# Altium PCB PCB.PcbDoc (part 2 of 2)
Units mm, origin at the board's own origin, x right, y up, seen from the top; angles counter-clockwise.
Board outline 168.8 x 66.7 mm, 2 copper layers (Top Layer, Bottom Layer); 76 components, 58 nets, 255 pads, 137 vias.
Unrouted connection lines stored in the file: 16.
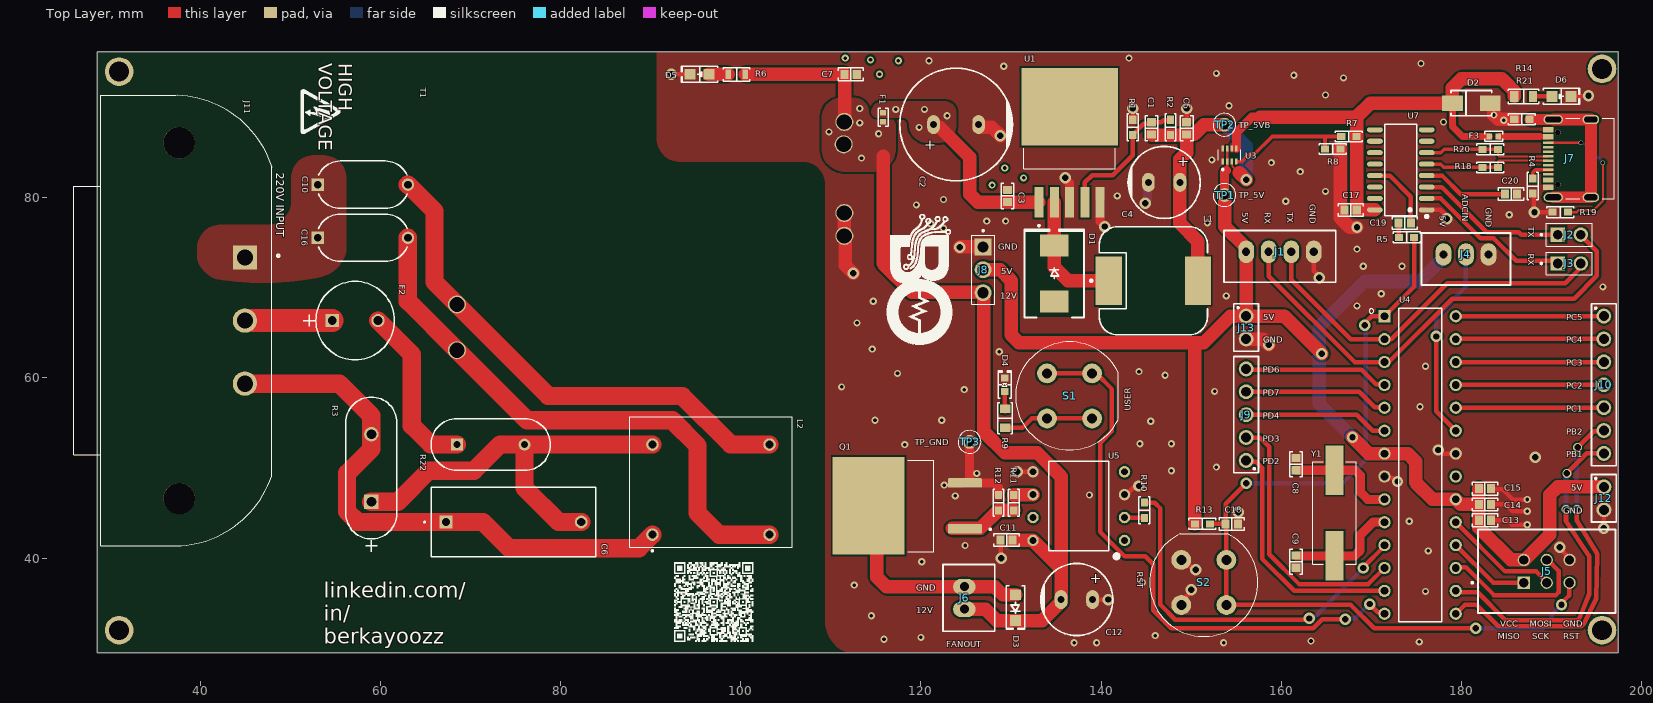
[diagram p0: Top Layer view]

## Part data (continued)
R5: library part HCJ0603ZT0R00, "RES 0 OHM JUMPER 1/4W 0603", Device Package="0603 (1608 Metric)", manufacturer="Stackpole Electronics Inc", Operating Temperature="-55°C ~ 155°C", Power (Watts)="0.25W, 1/4W", Ratings=AEC-Q200, Supplier Device Package=0603, Supplier Part Number 1=HCJ0603ZT0R00CT-ND, Tolerance=Jumper, componentlink1description=Datasheet, componentlink1url=https://www.seielect.com/catalog/sei-hcj.pdf, componentlink2description="DigiKey Link", componentlink2url=https://www.digikey.com/en/products/detail/stackpole-electronics-inc/HCJ0603ZT0R00/4357660, Composition="Metal Foil", Features="Automotive AEC-Q200", Height - Seated (Max)="0.018\" (0.45mm)", lastupdated="9.02.2024 20:43:15", Lifecycle Status=Active, Minimum Order=1, Number of Terminations=2, Package / Case="0603 (1608 Metric)", packaging=TapeAndReel, Part Number=HCJ0603ZT0R00, Part Status=Active, partid=10189, price=0.06, Resistance="0 Ohms", series=HCJ, Size / Dimension="0.061\" L x 0.031\" W (1.55mm x 0.80mm)", Supplier 1=DigiKey
R6: library part RK73H2ATTD6200F, "RES 620 OHM 1% 1/4W 0805", Device Package="0805 (2012 Metric)", manufacturer="KOA Speer Electronics, Inc.", Operating Temperature="-55°C ~ 155°C", Power (Watts)="0.25W, 1/4W", Ratings=AEC-Q200, Supplier Device Package=0805, Supplier Part Number 1=2019-RK73H2ATTD6200FCT-ND, Temperature Coefficient=±100ppm/°C, Tolerance=±1%, componentlink1description=Datasheet, componentlink1url=http://www.koaspeer.com/catimages/Products/RK73H/RK73H.pdf, componentlink2description="DigiKey Link", componentlink2url=https://www.digikey.com/en/products/detail/koa-speer-electronics-inc/RK73H2ATTD6200F/10234040, Composition="Thick Film", Features="Automotive AEC-Q200", Height - Seated (Max)="0.024\" (0.60mm)", lastupdated="25.07.2024 09:45:22", Lifecycle Status=Active, Minimum Order=1, Number of Terminations=2, Package / Case="0805 (2012 Metric)", packaging=CutTape, Part Number=RK73H2ATTD6200F, Part Status=Active, partid=33904, price=0.01, Resistance="620 Ohms", series=RK73H, Size / Dimension="0.079\" L x 0.049\" W (2.00mm x 1.25mm)", Supplier 1=DigiKey
R7 R8 R12 R13: library part RT0603FRE0710KL, "RES SMD 10K OHM 1% 1/10W 0603", Device Package="0603 (1608 Metric)", manufacturer=Yageo, Operating Temperature="-55°C ~ 155°C", Power (Watts)="0.1W, 1/10W", Supplier Device Package=0603, Supplier Part Number 1=YAG2321CT-ND, Temperature Coefficient=±50ppm/°C, Tolerance=±1%, componentlink1description=Datasheet, componentlink1url=https://www.yageo.com/upload/media/product/productsearch/datasheet/rchip/PYu-RT_1-to-0.01_RoHS_L_11.pdf, componentlink2description="DigiKey Link", componentlink2url=https://www.digikey.com/en/products/detail/yageo/RT0603FRE0710KL/1075040, Composition="Thin Film", Height - Seated (Max)="0.022\" (0.55mm)", lastupdated="25.07.2024 09:19:32", Lifecycle Status=Active, Minimum Order=1, Number of Terminations=2, Package / Case="0603 (1608 Metric)", packaging=TapeAndReel, Part Number=RT0603FRE0710KL, Part Status=Active, partid=5671, price=0.01, Resistance="10 kOhms", series=RT, Size / Dimension="0.063\" L x 0.031\" W (1.60mm x 0.80mm)", Supplier 1=DigiKey
R9 R14: library part AC0805FR-7W220RL, "RES 220 OHM 1% 1/4W 0805", Device Package="0805 (2012 Metric)", manufacturer=Yageo, Operating Temperature="-55°C ~ 155°C", Power (Watts)="0.25W, 1/4W", Ratings=AEC-Q200, Supplier Device Package=0805, Supplier Part Number 1=13-AC0805FR-7W220RLCT-ND, Temperature Coefficient=±100ppm/°C, Tolerance=±1%, componentlink1description=Datasheet, componentlink1url=https://www.yageo.com/upload/media/product/productsearch/datasheet/rchip/PYu-AC_51_RoHS_L_10.pdf, componentlink2description="DigiKey Link", componentlink2url=https://www.digikey.com/en/products/detail/yageo/AC0805FR-7W220RL/17022423, Composition="Thick Film", Features="Automotive AEC-Q200, Moisture Resistant", Height - Seated (Max)="0.024\" (0.60mm)", lastupdated="25.07.2024 09:19:55", Lifecycle Status=Active, Minimum Order=1, Number of Terminations=2, Package / Case="0805 (2012 Metric)", packaging=TapeAndReel, Part Number=AC0805FR-7W220RL, partid=87434, price=0.01, Resistance="220 Ohms", series=AC, Size / Dimension="0.079\" L x 0.049\" W (2.00mm x 1.25mm)", Supplier 1=DigiKey
R10: library part RT0603BRD07200RL, "RES SMD 200 OHM 0.1% 1/10W 0603", Device Package="0603 (1608 Metric)", manufacturer=Yageo, Operating Temperature="-55°C ~ 155°C", Power (Watts)="0.1W, 1/10W", Supplier Device Package=0603, Supplier Part Number 1=YAG1579CT-ND, Temperature Coefficient=±25ppm/°C, Tolerance=±0.1%, componentlink1description=Datasheet, componentlink1url=https://www.yageo.com/upload/media/product/productsearch/datasheet/rchip/PYu-RT_1-to-0.01_RoHS_L_11.pdf, componentlink2description="DigiKey Link", componentlink2url=https://www.digikey.com/en/products/detail/yageo/RT0603BRD07200RL/1072346, Composition="Thin Film", Height - Seated (Max)="0.022\" (0.55mm)", lastupdated="25.07.2024 09:19:29", Lifecycle Status=Active, Minimum Order=1, Number of Terminations=2, Package / Case="0603 (1608 Metric)", packaging=TapeAndReel, Part Number=RT0603BRD07200RL, Part Status=Active, partid=10314, price=0.03, Resistance="200 Ohms", series=RT, Size / Dimension="0.063\" L x 0.031\" W (1.60mm x 0.80mm)", Supplier 1=DigiKey
R11 R18 R20: library part AC0603FR-0710RL, "RES SMD 10 OHM 1% 1/10W 0603", Device Package="0603 (1608 Metric)", manufacturer=Yageo, Operating Temperature="-55°C ~ 155°C", Power (Watts)="0.1W, 1/10W", Ratings=AEC-Q200, Supplier Device Package=0603, Supplier Part Number 1=311-10LDCT-ND, Temperature Coefficient=±100ppm/°C, Tolerance=±1%, componentlink1description=Datasheet, componentlink1url=https://www.yageo.com/upload/media/product/productsearch/datasheet/rchip/PYu-AC_51_RoHS_L_7.pdf, componentlink2description="DigiKey Link", componentlink2url=https://www.digikey.com/en/products/detail/yageo/AC0603FR-0710RL/2828512, Composition="Thick Film", Features="Automotive AEC-Q200, Moisture Resistant", Height - Seated (Max)="0.022\" (0.55mm)", lastupdated="25.07.2024 09:19:31", Lifecycle Status=Active, Minimum Order=1, Number of Terminations=2, Package / Case="0603 (1608 Metric)", packaging=TapeAndReel, Part Number=AC0603FR-0710RL, Part Status=Active, partid=8121, price=0.01, Resistance="10 Ohms", series=AC, Size / Dimension="0.063\" L x 0.031\" W (1.60mm x 0.80mm)", Supplier 1=DigiKey
R21: library part CRCW06031M00JNEAHP, "RES SMD 1M OHM 5% 1/3W 0603", Device Package="0603 (1608 Metric)", manufacturer="Vishay Dale", Operating Temperature="-55°C ~ 155°C", Power (Watts)="0.333W, 1/3W", Ratings=AEC-Q200, Supplier Device Package=0603, Supplier Part Number 1=541-1.0MSACT-ND, Temperature Coefficient=±200ppm/°C, Tolerance=±5%, componentlink1description=Datasheet, componentlink1url=http://www.vishay.com/docs/20043/crcwhpe3.pdf, componentlink2description="DigiKey Link", componentlink2url=https://www.digikey.com/en/products/detail/vishay-dale/CRCW06031M00JNEAHP/2222314, Composition="Thick Film", Features="Automotive AEC-Q200, Pulse Withstanding", Height - Seated (Max)="0.022\" (0.55mm)", lastupdated="9.02.2024 20:42:32", Lifecycle Status=Active, Minimum Order=1, Number of Terminations=2, Package / Case="0603 (1608 Metric)", packaging=TapeAndReel, Part Number=CRCW06031M00JNEAHP, Part Status=Active, partid=21324, price=0.01, Resistance="1 MOhms", series=CRCW-HP, Size / Dimension="0.063\" L x 0.033\" W (1.60mm x 0.85mm)", Supplier 1=DigiKey
R22: "INRUSH CURRENT LIMITER", Manufacturer_Name=CANTHERM, Copyright="Copyright (C) 2025 Ultra Librarian. All rights reserved.", Manufacturer_Part_Number=MF72-010D11, RefDes=RefDes, Type=Type
S1 S2: "Pushbutton Switch SPST-NO Keyswitch Through Hole", Package=None, Availability=Unavailable, MP=D6R90_F1_LFS, price=None
T1: library part "HIECUBE AP12N24-Zero", "12V 85VAC~265VAC 2A 100V~370V 24W 87% AC/DC-DC Through Hole,49x36mm AC-DC Power Modules ROHS", componentlink1description=DATASHEET, componentlink1url=http://www.hiecube.com/wap/hypx/detail/id/10127
TP1 TP2 TP3: "Test Point Miniature THM H .300 Nylon 46 Insulated Brown PhosBronze/Silver", Package=None, Check_prices=https://www.snapeda.com/parts/5115/Keystone/view-part/?ref=eda, MF="Keystone Electronics", MP=5115, SnapEDA_Link=https://www.snapeda.com/parts/5115/Keystone/view-part/?ref=snap
U1: library part LM2596, "Pwr Sply Func, Voltage Regulator, Buck, Switching, TO-263, IS 5mA, VO 1.2 to 37V", Case/Package=TO-263, manufacturer="TI National Semiconductor", Max Operating Temperature=125°C, Max Output current=3A, Max Output Voltage=37V, Max Supply Voltage=40V, Min Operating Temperature=-40°C, Min Output Voltage=1.2V, Min Input Voltage=4.5V, Quiescent Current=5mA, Supplier Part Number=926-LM2596S-ADJ/NOPB, Switching Frequency=173kHz, Category="Voltage Regulators - Switching", componentlink1description=https://datasheet.ciiva.com/27056/2051160-27056491.pdf?src-supplier=Jameco, componentlink1url=https://datasheet.ciiva.com/27056/2051160-27056491.pdf?src-supplier=Jameco, componentlink2description=https://datasheet.ciiva.com/15112/getdatasheetpartid-55559-15112636.pdf?src-supplier=Verical, componentlink2url=https://datasheet.ciiva.com/15112/getdatasheetpartid-55559-15112636.pdf?src-supplier=Verical, ComponentLink3Description=https://datasheet.ciiva.com/41457/001013814-da-01-en-ic-reg-buc-lm2596s-adj-nopb-to-263-5-tid-41457756.pdf?src-supplier=Conrad, ComponentLink3URL=https://datasheet.ciiva.com/41457/001013814-da-01-en-ic-reg-buc-lm2596s-adj-nopb-to-263-5-tid-41457756.pdf?src-supplier=Conrad, ComponentLink4Description=https://datasheet.ciiva.com/22669/1874590-22669464.pdf?src-supplier=Element14, ComponentLink4URL=https://datasheet.ciiva.com/22669/1874590-22669464.pdf?src-supplier=Element14, ComponentLink5Description=https://datasheet.ciiva.com/14150/jqlm2596x-xx-e-14150653.pdf?src-supplier=Distrelec, ComponentLink5URL=https://datasheet.ciiva.com/14150/jqlm2596x-xx-e-14150653.pdf?src-supplier=Distrelec, ComponentLink6Description=https://datasheet.ciiva.com/6596/lm2596-6596342.pdf?src-supplier=Digikey, ComponentLink6URL=https://datasheet.ciiva.com/6596/lm2596-6596342.pdf?src-supplier=Digikey, designed by=berkay, Efficiency=73%, Height=4.57mm, Length=10.16mm, Manufacturer Part Number=LM2596S-ADJ/NOPB, Max Duty Cycle=100%, Mounting Technology="Surface Mount", Number of Channels=1NUMBER, Number of Outputs=1, Operating Supply Voltage=40V, Output Current=3A, Output Type=Adjustable, Output Voltage=37V, packaging=Rail/Tube, Pins=5, Pricing="1=9,04, 10=6,42, 50=6,13, 100=5,32, 1000=4,63, 10000=4,1 (USD)", Radiation Hardening=No, Reach SVHC Compliant=No, RoHS=Yes, RoHS Compliant=Yes, series=LM2596, Stock=1472, Supplier=Mouser, Thickness=4.58mm, Weight=0.056128oz, Width=8.64mm
U3: "1.6-V to 5.5-V, 40-mâ„", Package=None, Check_prices=https://www.snapeda.com/parts/TPS2116DRLR/Texas+Instruments/view-part/?ref=eda, MF="Texas Instruments", MP=TPS2116DRLR, SnapEDA_Link=https://www.snapeda.com/parts/TPS2116DRLR/Texas+Instruments/view-part/?ref=snap
U4: "ATmega Series 20 MHz 32 KB Flash 2 KB SRAM 8-Bit Microcontroller - DIP-28", Package=None, Availability=Unavailable, MP=ATMEGA328P-PU, price=None
U5: library part TLP250HF, "Photocoupler (photo-IC output), IGBT driver, IOP=+/-2.5 A, 3750 Vrms, DIP8", Manufacturer_Name="Toshiba Electronic Devices & Storage Corp.", Number_devices_in_Package=1, Source_Package=TLP250H, Copyright="Copyright (C) 2025 Ultra Librarian. All rights reserved.", Datasheet=https://toshiba.semicon-storage.com/info/docget.jsp?did=13872&prodName=TLP250H, Manufacturer_Part_Number=TLP250H(F), RefDes=Refdes, Type=Type
U7: JLCPCB Part Class="Extended Part", manufacturer=WCH(南京沁恒), Voltage - Supply=3.3V；5V, Add into BOM=yes, Applications Function=Transceiver, Convert to PCB=yes, Data Rate=2Mbps, Datasheet=https://atta.szlcsc.com/upload/public/pdf/source/20250604/33626338A5406B1E2A8163A86C0531AF.pdf, Device=CH340C, LCSC Part Name=CH340C, Manufacturer Part=CH340C, Supplier=LCSC, Supplier Footprint=SOP-16, Supplier Part=C84681, Symbol=CH340C, USB Protocol="USB 2.0"
Y1: "16 MHz Â±30ppm Crystal 20pF 40 Ohms HC-49/US", Package="CSM-7X-3L-5G3X-2 ECS", Check_prices=https://www.snapeda.com/parts/ECS-160-20-5PX-TR/ECS/view-part/?ref=eda, MF="ECS Inc.", MP=ECS-160-20-5PX-TR, SnapEDA_Link=https://www.snapeda.com/parts/ECS-160-20-5PX-TR/ECS/view-part/?ref=snap

## Free pads (board coordinates)
  round 3.175 hole 2.2 mask-3.2: q(31,32) q(31,94) q(195.6,32) q(195.6,94.3)

## Via types
v1: diameter 0.8, hole 0.4, Top Layer to Bottom Layer, tented both sides, 92 vias
v2: diameter 1.27, hole 0.711, Top Layer to Bottom Layer, tented both sides, 38 vias
v3: diameter 1, hole 0.7, Top Layer to Bottom Layer, tented both sides, 4 vias
v4: diameter 0.5, hole 0.4, Top Layer to Bottom Layer, tented both sides, 2 vias
v5: diameter 1.27, hole 0.711, Top Layer to Bottom Layer, 1 vias

## Nets (pads, with @x,y where several pads share a name; then routed paths per layer and width w, separated by ;. In a path a pad name is that pad's centre, name@x,y a point inside that pad or via, vN(x,y) a via of type N, cw(c..) or ccw(c..) an arc to the next point about the centre after c; other vN are vias at no path point)
5V_MAIN: C13.2 C14.2 C15.2 J1.1 J4.1 J5.02 J8.2 J12.1 J13.1 R13.2 TP1.TP U3.2 U3.7 U4.7 U4.20 | length 162.8
  Top Layer w0.3: 153.892,83.039 154,83.147 U3.2 U3.7
  Top Layer w1: TP1.TP 153.7,82.847 153.892,83.039
  Top Layer w1.5: J8.2 128.8,72 130,70.8 130,64.779 130.879,63.9 150.4,63.9 ; R13.2 150.4,63.9 ; TP1.TP 153.7,76.843 156.1,74.443 J1.1 J13.1 ; v2(164.5,62.7) 160.34,66.86 J13.1 ; v2(167.9,53.4) 169.7,51.6 U4.7 174.021,51.6 174.9,50.721 174.9,48.4 176.78,46.52 U4.20 179.94,45.95 C14.2 ; C15.2 C14.2 ; J12.1@195.769,47.9 190.679,47.9 189.8,47.021 189.8,42.6 187.02,39.82 187.02,39.8 185.485,39.8 181.925,43.36 C13.2 C14.2 ; 150.4,63.9 151.4,63.9 154.331,66.831 156.071,66.831 J13.1
  Bottom Layer w1.5: v2(167.9,53.4) 164.2,57.1 164.2,62.4 v2(164.5,62.7) 164.2,63 164.2,65.7 169.2,70.7 175.375,70.7 178,73.325 J4.1
12-5V: C1.2 C4.1 C5.2 L1.2 R2.2 TP2.TP U3.3 | length 35.3
  Top Layer w0.2: U3.3 154.5,83.83 154.56,83.77 154.56,83.503 155.063,83 155.2,83
  Top Layer w1.5: C1.2 145.675,86.95 R2.2 149.425,86.95 C5.2 ; C4.1 148.75,77.15 150.75,75.15 L1.2 ; C4.1@148.75,81.95 148.75,84.26 149.5,85.01 C5.2 ; TP2.TP 151.415,88.1 150.363,87.048 149.523,87.048 C5.2 ; 155.35,82.75 v2(156.1,82)
  Bottom Layer w1.5: TP2.TP 156.1,85.699 v2(156.1,82)
12V: C7.2 C11.2 C12.2 D3.2 F1.1 J6.1 J8.3 R6.1 T1.3 T1.4 U5.8 | length 99.4
  Top Layer w1.5: R6.1 C7.2 111.525,88.435 cw(c111.5,88.435) T1.3 ; 115.8,84.6 115.8,72.7 118.968,69.532 126.828,69.532 J8.3 126.972,69.388 126.972,69.123 127,69.095 127,54 129.3,51.7 132.9,51.7 135.55,49.05 135.55,38.85 ; J6.1 127.175,34.325 128.43,33.07 D3.2 133.47,33.07 135.55,35.15 C12.2 135.55,38.85 ; C11.2@130.215,41.96 U5.8 135.55,38.85
  other v1: 113.4,84.4 115.3,87.1 109.8,87.3 113.2,88.3 113.2,89.9
AC_L: F2.1 J11.2 | length 9.7
  Top Layer w2.54: J11.2 F2.1
AC_N: C6.1 J11.3 L2.1 R3.2 | length 63.5
  Top Layer w2.032: J11.3 55.438,59.362 59,55.8 R3.2 59,52.1 56.3,49.4 56.3,45.19 57.49,44 C6.1 71.4,44 74.3,41.1 88.7,41.1 L2.1
D_N: J7.A7 R20.1 R20.2 U7.6 | length 13.8
  Top Layer w0.2: R20.1 184.05,84.707 184.167,84.59 186.607,84.59 189.595,84.59 J7.A7
  Top Layer w0.381: U7.6@176.682,84.998 177.698,84.998 178.063,85.363 R20.2 R20.1
D_P: J7.A6 R18.1 R18.2 U7.5 | length 13.8
  Top Layer w0.2: R18.1 184.05,84.019 184.167,84.136 186.795,84.136 189.595,84.136 J7.A6
  Top Layer w0.381: U7.5@176.705,83.71 177.69,83.71 178.037,83.363 R18.2 R18.1
GND: C2.2 C3.1 C4.2 C5.1 C7.1 C8.2 C9.2 C11.1 C12.1 C13.1 C14.1 C15.1 C17.2 C18.2 C20.1 D1.1 D2.2 D4.2 D5.2 D6.2 J1.4 J4.3 J5.06 J7.A1_B12 J7.B1_A12 J8.1 J12.2 J13.2 Q1.3 R1.1 R4.1 R8.1 R12.1 R19.1 R21.2 S2.1 S2.2 T1.5 T1.6 TP3.TP U1.3 U1.5 U3.1 U3.8 U4.8 U4.22 U5.3 U5.5 U7.1 | length 98.6
  Top Layer w0.5: v2(92.3,93.7) D5.2 ; C11.1 128.862,41.963 128.862,40.037 v2(128.9,40) ; v2(130.7,49.6) 130.71,49.59 132.43,49.59 U5.5 ; C12.1 v2(140.8,35.4) ; U5.3 142.808,47.04 143.621,47.853 144.053,47.853 v2(144.2,48) ; R1.1 v2(143.5,89.9) ; S2.2 148.9,35.192 150,36.292 v2(150,36.5) ; S2.1 149.192,39.8 150.292,38.7 v2(150.5,38.7) ; C5.1 v2(149.5,89.9) ; C18.2 155.188,43.812 155.188,45.088 v2(155.2,45.1) ; J1.4 163.6,71.908 164.2,71.308 v2(164.2,71.1) ; U4.8 171.614,48.896 172.296,48.896 172.692,48.5 v2(172.9,48.5) ; U7.1 177.652,78.648 178.2,78.1 178.2,78.074 178.383,77.891 v2(178.383,77.683) ; v2(177.4,52) 177.608,52 178.008,51.6 U4.22 ; C13.1 185.1,44.2 185.6,43.7 v1(187.3,43.7) ; C14.1 184.95,45.95 185.7,45.2 v1(187.3,45.2) ; C15.1 183.427,47.7 183.475,47.652 184.548,47.652 185.7,46.5 v1(187.3,46.5) ; R4.1 188,80.35 188,78.5 v2(188.1,78.4) R19.1 ; v2@188.188,51.212 v2(188.2,51.2) ; v2(190.9,41.2) 190.9,41.1 192.1,39.9 J5.06@192.1,39.8 ; D6.2 192.175,91.275 194.075,91.275 v2(194.1,91.3) ; v2(195.8,43.3) 195.805,43.305 195.805,45.355 J12.2
  Top Layer w1: Q1.3 Q1.3@125.12,48.34 ; TP3.TP 125.4,48.62 Q1.3@125.12,48.34 ; R12.1 128.595,47.005 128.595,47.905 128.16,48.34 Q1.3@125.12,48.34 ; v2(136,82.2) 136,82.127 136.5,81.627 U1.3 ; U1.5 139.9,77.373 140.4,76.873 v2(140.4,76.8)
  Top Layer w1.5: T1.5 T1.6 111.59,75.67 111.59,72.51 v2(112.5,71.6) ; v2(124.3,74.5) 124.34,74.54 J8.1 ; C2.2 126.4,87.875 126.45,87.825 127.875,87.825 v2(128.8,86.9) ; J13.2 156.129,64.291 158.009,64.291 v2(158.6,63.7) ; R8.1 166.55,77.75 167.6,76.7 v2(168.4,76.7) ; D2.2 183.5,90.5 183.6,90.4 v1(183.6,89.179) 184.079,88.7 R21.2
  Bottom Layer w0.5: S2.2 S2.2@148.9,35.26
  Bottom Layer w1: v2(144.9,79.4) 144.9,79.473 145.173,79.747 145.173,81.623 C4.2
  other v1: 137,30.6 139.5,30.6 153.6,30.6 175.3,30.7 163.3,30.8 115.9,31 120,31.2 146,31.4 114.5,33.6 176,36.3 112.6,37 144.6,37.3 120.1,39.6 176.3,40.8 124.9,41.4 174.2,44.1 123.8,46.9 138.7,47 122.6,48.1 126.2,49.4 147.8,49.7 152.8,50.1 118.2,52.6 144.3,52.7 147.8,52.7 145.5,55.2 114.9,55.3 122.3,55.3 175.4,56.8 152.6,58.5 124.8,58.7 111.2,59 147.1,60.3 117.4,60.5 144.2,60.7 176,61.3 128.7,62.9 114.6,63.2 112.9,66.1 168.405,67.995 114.7,68.5 153.9,69.1 171.1,69.35 195.7,70.1 169.1,72.4 173.4,72.4 168.4,74.3 122.5,76.6 121.1,77.1 151.8,77.2 127.3,77.4 129.4,77.4 185.3,78.1 119.5,79.2 160.5,79.6 122.5,79.8 141.8,80.2 164.9,80.7 162.1,82.9 158.9,83.9 152.3,84.2 178,88.4 184.7,88.6 154.2,90.2 164.9,91.4 166.9,93.3 161.4,93.6 152.8,93.8 129.2,94.6 175.5,94.9 120.9,95.2 143.1,95.5
NetC1_1: C1.1 R1.2 R2.1 U1.4 | length 16
  Top Layer w0.5: U1.4 138.2,81.7 139,82.5 141.3,82.5 143.5,84.7 R1.2@143.5,87 ; R1.2 R1.2@143.5,87 ; R2.1 147.65,88.6 146.9,88.6 146.675,88.375 C1.1 145.455,88.23 144.735,88.23 144.327,87.823 144.323,87.823 R1.2@143.5,87
NetC2_1: C2.1 C3.2 F1.2 U1.1 | length 17.8
  Top Layer w1.5: C2.1 121.45,88.075 121.45,87.825 122.075,87.825 125.425,84.475 125.425,80.404 126.324,79.505 C3.2@129.6,79.505 ; C3.2@129.62,79.505 U1.1
  other v1: 119.8,87.8 122.9,89.1 117.2,89.8 120.4,89.8
NetC6_2: C6.2 L2.4 R3.1 R22.2 | length 46.5
  Top Layer w2.032: R3.1 61.95,46.25 65.4,49.7 70.4,49.7 73.3,52.6 R22.2 ; C6.2 79.8,44 76,47.8 R22.2 ; L2.4 R22.2
NetC8_1: C8.1 U4.9 Y1.2 | length 12.2
  Top Layer w1.016: C8.1 168.205,49.746 168.8,49.151 168.8,47.3 169.58,46.52 U4.9
NetC9_1: C9.1 U4.10 Y1.1 | length 12.2
  Top Layer w1.016: C9.1@161.679,40.246 168.139,40.246 168.734,40.841 168.734,42.534 170.208,44.008 U4.10@171.342,44.008
NetC10_2: C10.2 L2.3 T1.2 | length 56.7
  Top Layer w2.032: C10.2 66,78.507 66,70.65 T1.2 78.65,58 93.5,58 98.9,52.6 L2.3
NetC16_2: C16.2 L2.2 T1.1 | length 62.3
  Top Layer w2.032: C16.2 63.057,68.514 T1.1 76.27,55.3 92.4,55.3 95.2,52.5 95.2,45 97.6,42.6 L2.2
NetC18_1: C18.1 J5.05 R5.2 R13.1 S2.3 S2.4 U4.1 | length 101
  Top Layer w0.5: R13.1 C18.1 ; v2(156.1,48.3) 153.825,46.025 C18.1 ; v2(169.25,65.85) 169.397,65.997 169.397,66.216 170.021,66.84 U4.1 174.75,70.14 R5.2 ; v2(181.6,32.2) 170.3,32.2 167.7,34.8 S2.3 S2.4 153.863,39.837 153.863,43.762 C18.1 ; v2(191.1,34.8) 191.1,35.008 191.934,35.842 191.934,37.094 J5.05@192.1,37.26
  Bottom Layer w0.5: v2(156.1,48.3) 166.8,48.3 169.4,50.9 169.4,65.172 169.397,65.175 169.397,65.703 v2(169.25,65.85) ; v2(181.6,32.2) 189.1,32.2 190.026,33.126 190.026,33.726 v2(191.1,34.8)
NetC19_1: C19.1 R5.1 | length 1.6
  Top Layer w0.5: C19.1 173.038,77.187 173.038,75.612 R5.1
NetC19_2: C19.2 U7.13 | length 7.9
  Top Layer w0.5: U7.13 172.042,82.458 174.375,80.125 C19.2
NetC20_2: C20.2 U7.4 | length 9.5
  Top Layer w0.5: U7.4 177.842,82.458 179.9,80.4 C20.2
NetD1_2: D1.2 L1.1 U1.2 | length 13.9
  Top Layer w1.5: U1.2 D1.2 134.8,72.3 136.316,70.784 L1.1
NetD3_1: D3.1 J6.2 Q1.2 | length 24.2
  Top Layer w1.5: Q1.2@115,45.8 115.1,45.7 115.1,37.9 116.175,36.825 J6.2 128.175,36.825 129.07,35.93 D3.1
NetD4_1: D4.1 R9.2 | length 2
  Top Layer w0.5: R9.2@129.3,56.626 D4.1
  Top Layer w1.016: R9.2@129.3,56.626 R9.2
NetD5_1: D5.1 R6.2 | length 2.1
  Top Layer w1.5: D5.1 R6.2
NetD6_1: D6.1 R14.2 | length 2.1
  Top Layer w0.5: R14.2 D6.1
NetF2_2: F2.2 R22.1 | length 19.1
  Top Layer w2.032: F2.2 63.5,62.602 63.5,54.7 65.6,52.6 R22.1
NetF3_1: F3.1 J7.B4_A9 | length 5.5
  Top Layer w0.6: 188.737,86.763 J7.B4_A9
  Top Layer w0.8: F3.1 188.7,86.8
NetJ1_2: J1.2 J2.2 U4.3 | length 52.4
  Top Layer w0.5: J1.2 158.6,71.3 168.14,61.76 U4.3 171.944,61.76 178.984,68.8 192.5,68.8 195.022,71.322 195.022,74.062 193.24,75.845 J2.2
NetJ1_3: J1.3 J3.2 U4.2 | length 41.7
  Top Layer w0.5: J1.3 161.1,70.9 167.7,64.3 U4.2 172.221,64.3 178.421,70.5 191.5,70.5 193.201,72.201 193.201,72.661 J3.2
NetJ2_1: J2.1 U7.3 | length 16.8
  Top Layer w0.5: U7.3 177.812,81.188 182.82,76.18 186.344,76.18 186.624,75.9 J2.1
NetJ3_1: J3.1 U7.2 | length 17.6
  Top Layer w0.5: U7.2 177.682,79.918 182.12,75.48 183.582,75.48 186.062,73 190.4,73 J3.1
NetJ4_2: J4.2 U4.23 | length 21.8
  Top Layer w0.5: v5(177.2,64.6) 177.2,56.31 U4.23
  Bottom Layer w0.5: v5(177.2,64.6) 177.2,66.8 180.5,70.1 J4.2
NetJ5_01: J5.01 U4.18 | length 9.4
  Top Layer w0.5: U4.18 183.55,37.26 J5.01@187.02,37.26
NetJ5_03: J5.03 U4.19 | length 13
  Top Layer w0.5: U4.19 184.837,38.513 188.307,38.513 J5.03@189.56,37.26
NetJ5_04: J5.04 U4.17 | length 17
  Top Layer w0.5: U4.17 179.47,39 180.5,39 183.6,35.9 190.482,35.9 190.775,36.193 190.775,38.585 J5.04@189.56,39.8
NetJ7_A5: J7.A5 R4.2 | length 3
  Top Layer w0.381: R4.2 187.9,82.8 188.213,83.113 J7.A5 J7.A5@190.1,83.113
NetJ7_B5: J7.B5 R19.2 | length 15.6
  Top Layer w0.254: J7.B5 193.25,86.113 v4(193.263,86.1) ; R19.2 192.8,78.4 193,78.6 194.638,78.6 195.695,79.657 195.695,83.895 v4(195.7,83.9)
  Bottom Layer w0.254: v4(193.263,86.1) 193.31,86.053 193.547,86.053 v4(195.7,83.9)
NetJ7_SH1: J7.SH1 J7.SH2 J7.SH3 J7.SH4 R21.1 | length 19.6
  Top Layer w1.2: R21.1@187.567,88.683 J7.SH2
  Top Layer w1.3: J7.SH1 J7.SH3 J7.SH4 J7.SH2
NetJ9_1: J9.1 U4.13 | length 27.3
  Top Layer w0.5: J9.1 156.234,50.706 157.194,50.706 157.9,50 157.9,39.9 161.44,36.36 U4.13
NetJ9_2: J9.2 U4.12 | length 29.8
  Top Layer w0.5: J9.2 157.62,53.38 158.657,52.343 158.657,40.435 161.973,37.119 169.669,37.119 U4.12
NetJ9_3: J9.3 U4.6 | length 16.1
  Top Layer w0.5: J9.3 168.38,55.92 170.16,54.14 U4.6
NetJ9_4: J9.4 U4.5 | length 16.1
  Top Layer w0.5: J9.4 168.64,58.46 170.355,56.745 171.385,56.745 U4.5
NetJ9_5: J9.5 U4.4 | length 16.1
  Top Layer w0.5: J9.5 156.2,60.9 168.9,60.9 170.515,59.285 171.385,59.285 U4.4
NetJ10_1: J10.1 U4.28 | length 16.4
  Top Layer w0.5: U4.28 195.78,66.84 J10.1
NetJ10_2: J10.2 U4.27 | length 16.4
  Top Layer w0.5: U4.27 179.39,64.32 J10.2
NetJ10_3: J10.3 U4.26 | length 16.4
  Top Layer w0.5: U4.26 195.78,61.76 J10.3
NetJ10_4: J10.4 U4.25 | length 16.4
  Top Layer w0.5: U4.25 179.39,59.24 J10.4
NetJ10_5: J10.5 U4.24 | length 16.4
  Top Layer w0.5: U4.24 195.78,56.68 J10.5
NetJ10_6: J10.6 U4.15 | length 40
  Top Layer w0.5: U4.15 180.35,34.8 181.7,34.8 184.074,32.426 193.011,32.426 193.296,32.426 193.589,32.719 194.953,35.497 195.048,40.356 195.048,40.503 194.974,40.624 192.8,44.149 v3(192.8,45.4) ; v3(192.9,52.3) 194.666,54.066 195.706,54.066 J10.6
  Bottom Layer w0.5: v3(192.8,45.4) 192.8,52.2 v3(192.9,52.3)
NetJ10_7: J10.7 U4.16 | length 37.3
  Top Layer w0.5: U4.16 179.53,36.2 181.8,36.2 184.874,33.126 192.878,33.126 193.096,33.343 194.183,35.988 194.183,40.189 194.1,40.315 191.6,44.1 v3(191.6,45.4) ; v3(191.7,49.4) 193.92,51.62 J10.7 J10.7@195.848,51.572
  Bottom Layer w0.5: v3(191.6,45.4) 191.6,49.3 v3(191.7,49.4)
NetQ1_1: Q1.1 R11.2 R12.2 | length 7.6
  Top Layer w1.5: Q1.1@123.5,43.3 126.6,43.3 R12.2 R11.2
NetR7_1: R7.1 R8.2 U3.4 | length 14.2
  Top Layer w0.4: U3.4@155.046,84 155.6,84 156.3,84.7 156.9,84.7 159,86.8 164.85,86.8 ; R8.2 164.85,86.8 ; R7.1 164.85,86.8
NetR9_1: R9.1 S1.3 S1.4 | length 10.1
  Top Layer w0.5: R9.1 131.272,54.472 132.3,55.5 S1.4
NetR10_1: R10.1 U4.11 | length 41.8
  Top Layer w0.5: R10.1 145.95,46.15 146.587,45.513 146.587,34.807 148.225,33.17 162.97,33.17 v2(163.1,33.3) ; v2(169.1,38.9) 169.1,38.995 171.45,41.345 U4.11
  Bottom Layer w0.5: v2(163.1,33.3) 163.247,33.447 163.647,33.447 v2(169.1,38.9)
NetR10_2: R10.2 U5.2 | length 2.2
  Top Layer w0.5: U5.2 142.625,44.475 144.775,44.475 R10.2
NetR11_1: R11.1 U5.6 | length 2.2
  Top Layer w1.5: R11.1 130.34,47.04 U5.6
NetS1_1: S1.1 S1.2 U4.14 | length 64.8
  Top Layer w0.5: S1.2 S1.1 139.46,60.5 141.2,58.76 141.2,54.1 139.9,52.8 139.9,42.9 142.6,40.2 144.9,40.2 145.8,39.3 145.8,34.2 147.785,32.215 163.549,32.215 164.534,33.2 v2(167.1,33.2) ; v2(169.8,34.9) 170.716,33.984 171.286,33.984 U4.14
  Bottom Layer w0.5: v2(167.1,33.2) 167.247,33.347 168.247,33.347 v2(169.8,34.9)
PE: C10.1 C16.1 J11.1
USB_5V: C17.1 D2.1 F3.2 R7.2 R14.1 U3.5 U3.6 U7.16 | length 56.6
  Top Layer w0.8: D2.1 179,87.9 180.1,86.8 F3.2
  Top Layer w1: U3.5@155,85.533 155,87.216 156.734,88.95 157.65,88.95
  Top Layer w1.5: 157.65,88.95 168.35,88.95 ; U7.16 C17.1 168.375,86.775 R7.2 168.35,88.95 ; R14.1 185.85,91.843 184.493,93.2 180,93.2 179,92.2 D2.1 169.9,90.5 168.35,88.95
pads on no net: J7. J7.A4_B9 J7.A8 J7.B6 J7.B7 J7.B8 J11. U1.6 U4.21 U5.1 U5.4 U5.7 U7.7 U7.8 U7.9 U7.10 U7.11 U7.12 U7.14 U7.15
copper on no net:
  other v1: 127.9,81.4 131.4,82.2 129.3,83.3 115.4,93.7 117.5,95.2 114.4,95.3 111.6,95.5

## Polygon pours and split planes (outlines as drawn)
GND on Top Layer "GND_L01_P039" (solid, remove dead copper, pour order 39): 90.7,96.2 197.4,96.202 197.4,29.5 111.9,29.5 cw(c113.017,32.94) 109.4,32.94 109.4,81.46 ccw(c106.86,81.46) 106.86,84 93.24,84 cw(c93.24,86.54) 90.7,86.54 90.7,93.7
USB_5V on Top Layer "USB_5V_L01_P026" (solid, pour order 26): 154.376,86.045 ccw(c154.612,85.83) 154.3,85.9 154.3,85.307 ccw(c154.585,85.304) 154.568,85.02 154.9,85 ccw(c154.961,85.976) 155.118,85.011 ccw(c154.864,85.953) 155.27,85.066 ccw(c155.012,85.48) 155.5,85.48 155.5,85.9 ccw(c155.3,85.9) 155.3,86.1 154.5,86.1 ccw(c154.5,85.932)
12V on Top Layer "12V_L01_P024" (solid, pour order 24): 117.2,88.054 ccw(c116.407,88.054) 116.407,88.847 114.853,88.847 cw(c114.853,89.5) 114.2,89.5 ccw(c112.6,89.5) 112.6,91.1 111.2,91.1 ccw(c111.2,88.9) 109,88.9 109,85.44 ccw(c111.54,85.44) 111.54,82.9 114.66,82.9 ccw(c114.66,85.44) 117.2,85.44 117.2,87.5
NetC2_1 on Top Layer "NETC2_1_L01_P020" (solid, pour order 20): 115.7,90.7 ccw(c115.7,89.5) 114.5,89.5 ccw(c115.1,89.5) 115.1,88.9 117.9,88.9 cw(c117.9,88.1) 118.7,88.1 ccw(c120.7,88.1) 120.7,86.1 122,86.1 ccw(c122,88) 123.9,88 123.9,89.5 ccw(c122.7,89.5) 122.7,90.7 121.1,90.7
PE on Top Layer "PE_L01_P017" (solid, pour order 17): 39.7,74.46 cw(c42.24,74.46) 42.24,77 47.56,77 ccw(c47.56,79.54) 50.1,79.54 50.1,82.16 cw(c52.64,82.16) 52.64,84.7 53.66,84.7 cw(c53.66,82.16) 56.2,82.16 56.2,74.04 cw(c52.517,74.885) 53.55,71.25 cw(c46.944,100.591) 41.85,70.95 cw(c42.86,74.11) 39.7,73.1
GND on Bottom Layer "GND_L02_P038" (solid, remove dead copper, pour order 38): 90.7,96.2 197.4,96.202 197.4,29.5 111.9,29.5 cw(c113.017,32.94) 109.4,32.94 109.4,81.46 ccw(c106.86,81.46) 106.86,84 93.24,84 cw(c93.24,86.54) 90.7,86.54 90.7,93.7

## Other copper
Top Layer:
  pour cut-out: 141.4,76.75 cw(c141.45,76.75) 141.45,76.8 150.1,76.8 cw(c150.1,75.05) 151.85,75.05 151.85,66.9 cw(c149.75,66.9) 149.75,64.8 141.7,64.8 cw(c141.7,66.7) 139.8,66.7 139.8,74.9 cw(c141.6,74.9) 141.6,76.7
  pour cut-out: 131.5,66.8 131.5,76.5 138.05,76.5 138.05,66.8
Bottom Layer:
  pour cut-out: 141.4,76.75 cw(c141.45,76.75) 141.45,76.8 150.1,76.8 cw(c150.1,75.05) 151.85,75.05 151.85,66.9 cw(c149.75,66.9) 149.75,64.8 141.7,64.8 cw(c141.7,66.7) 139.8,66.7 139.8,74.9 cw(c141.6,74.9) 141.6,76.7
  pour cut-out: 131.5,66.8 131.5,76.5 138.05,76.5 138.05,66.8

## Silkscreen, mask and mechanical layers (free items; w line width, h text height)
Top Overlay:
  drawing of 124 lines, arcs and shapes, not listed
  text "HIGH / VOLTAGE" at 53.138,94.951 h1.5 r270
  text "TP_5VB" at 155.303,87.698 h0.7
  text "220V INPUT" at 48.453,82.797 h0.89 r270
  text "ADCIN" at 180.103,80.397 h0.7 r270
  text "TP_5V" at 155.303,79.92 h0.7
  text "GND" at 163.156,79.297 h0.7 r270
  text "GND" at 182.703,78.897 h0.7 r270
  text "5V" at 155.656,78.408 h0.7 r270
  text "RX" at 158.156,78.408 h0.7 r270
  text "TX" at 160.656,78.408 h0.7 r270
  text "5V" at 177.603,77.997 h0.7 r270
  text "TX" at 187.403,76.797 h0.7 r270
  text "GND" at 128.603,74.203 h0.7
  text "RX" at 187.403,73.797 h0.7 r270
  text "5V" at 128.903,71.503 h0.7
  text "12V" at 128.803,68.803 h0.7
  text "5V" at 157.997,66.416 h0.7
  text "PC5" at 191.603,66.416 h0.7
  text "GND" at 157.997,63.876 h0.7
  text "PC4" at 191.603,63.876 h0.7
  text "PC3" at 191.603,61.336 h0.7
  text "PD6" at 157.953,60.556 h0.7
  text "PC2" at 191.603,58.796 h0.7
  text "PD7" at 157.953,58.016 h0.7
  text "USER" at 143.297,56.371 h0.7 r90
  text "PC1" at 191.603,56.256 h0.7
  text "PD4" at 157.953,55.476 h0.7
  text "PB2" at 191.603,53.716 h0.7
  text "PD3" at 157.953,52.936 h0.7
  text "TP_GND" at 119.303,52.52 h0.7
  text "PB1" at 191.603,51.176 h0.7
  text "PD2" at 157.953,50.396 h0.7
  text "5V" at 192.196,47.456 h0.7
  text "GND" at 191.307,44.916 h0.7
  text "RST" at 144.003,38.497 h0.7 r270
  text "GND" at 119.503,36.381 h0.7
  text "12V" at 119.503,33.881 h0.7
  text "VCC" at 184.303,32.403 h0.7
  text "MOSI" at 187.579,32.403 h0.7
  text "GND" at 191.303,32.403 h0.7
  text "MISO" at 184.003,31.003 h0.7
  text "SCK" at 187.875,31.003 h0.7
  text "RST" at 191.303,31.003 h0.7
  text "linkedin.com/ / in/ / berkayoozz" at 53.698,30.5 h1.7
  text "FANOUT" at 122.803,30.103 h0.7
Top Solder:
  circle w1.5: c195.6,32 r0.9
  circle w1.5: c195.6,94.3 r0.9
  circle w1.5: c31,32 r0.9
  circle w1.5: c31,94 r0.9

## Text inside footprints (layer, text, board x,y; h text height)
C2: Top Overlay "+" at 121.7,86.725 h2 r180
C4: Top Overlay "+" at 148.45,83.1 h2
C12: Top Overlay "+" at 138.75,36.8 h2